# Altium PCB PCB-A6-2x3-V-CUT.PcbDoc
Units mm, origin at the board's own origin, x right, y up, seen from the top; angles counter-clockwise.
Board outline 146.6 x 176.2 mm, 2 copper layers (Top Layer, Bottom Layer); 10 components, 0 nets, 10 pads, 0 vias.
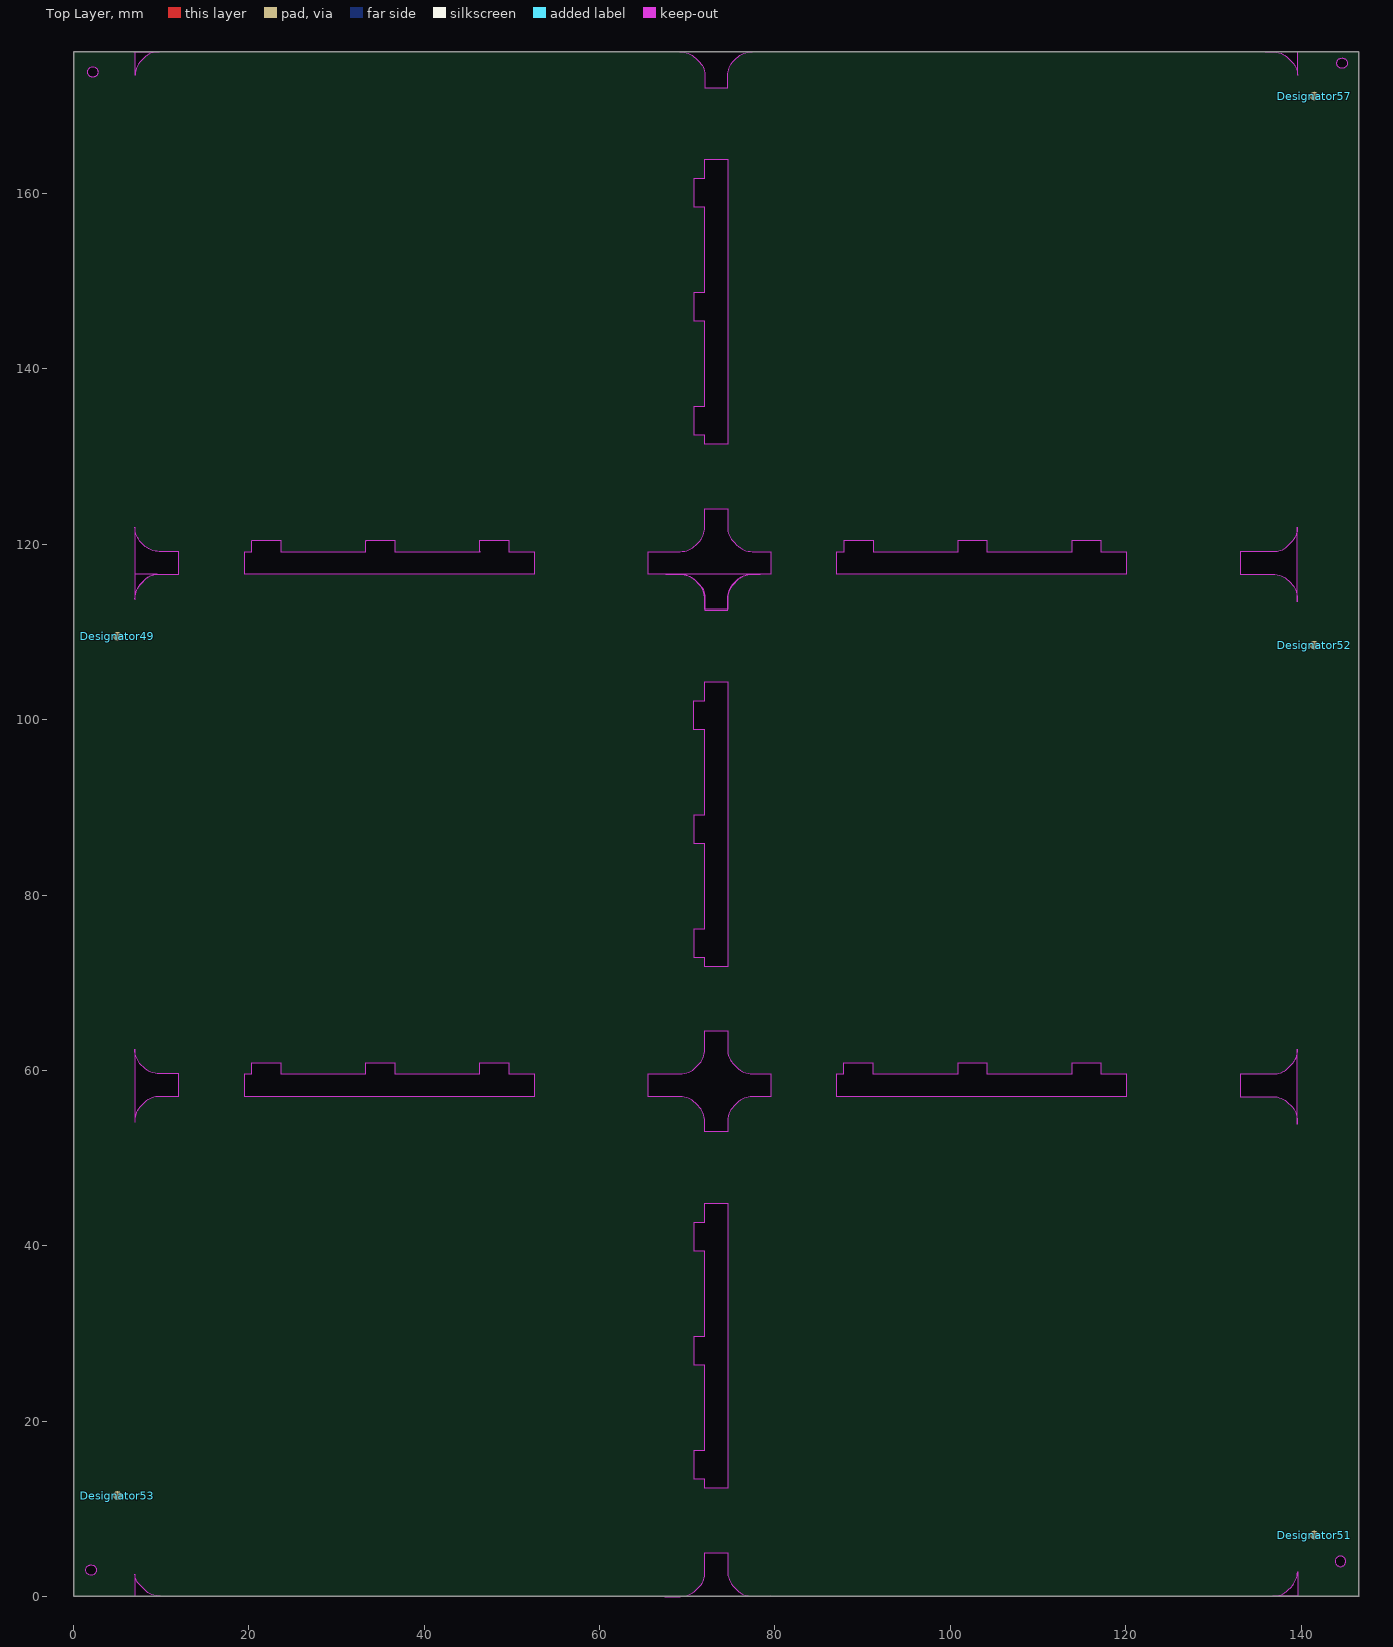
[diagram p0: Top Layer view]
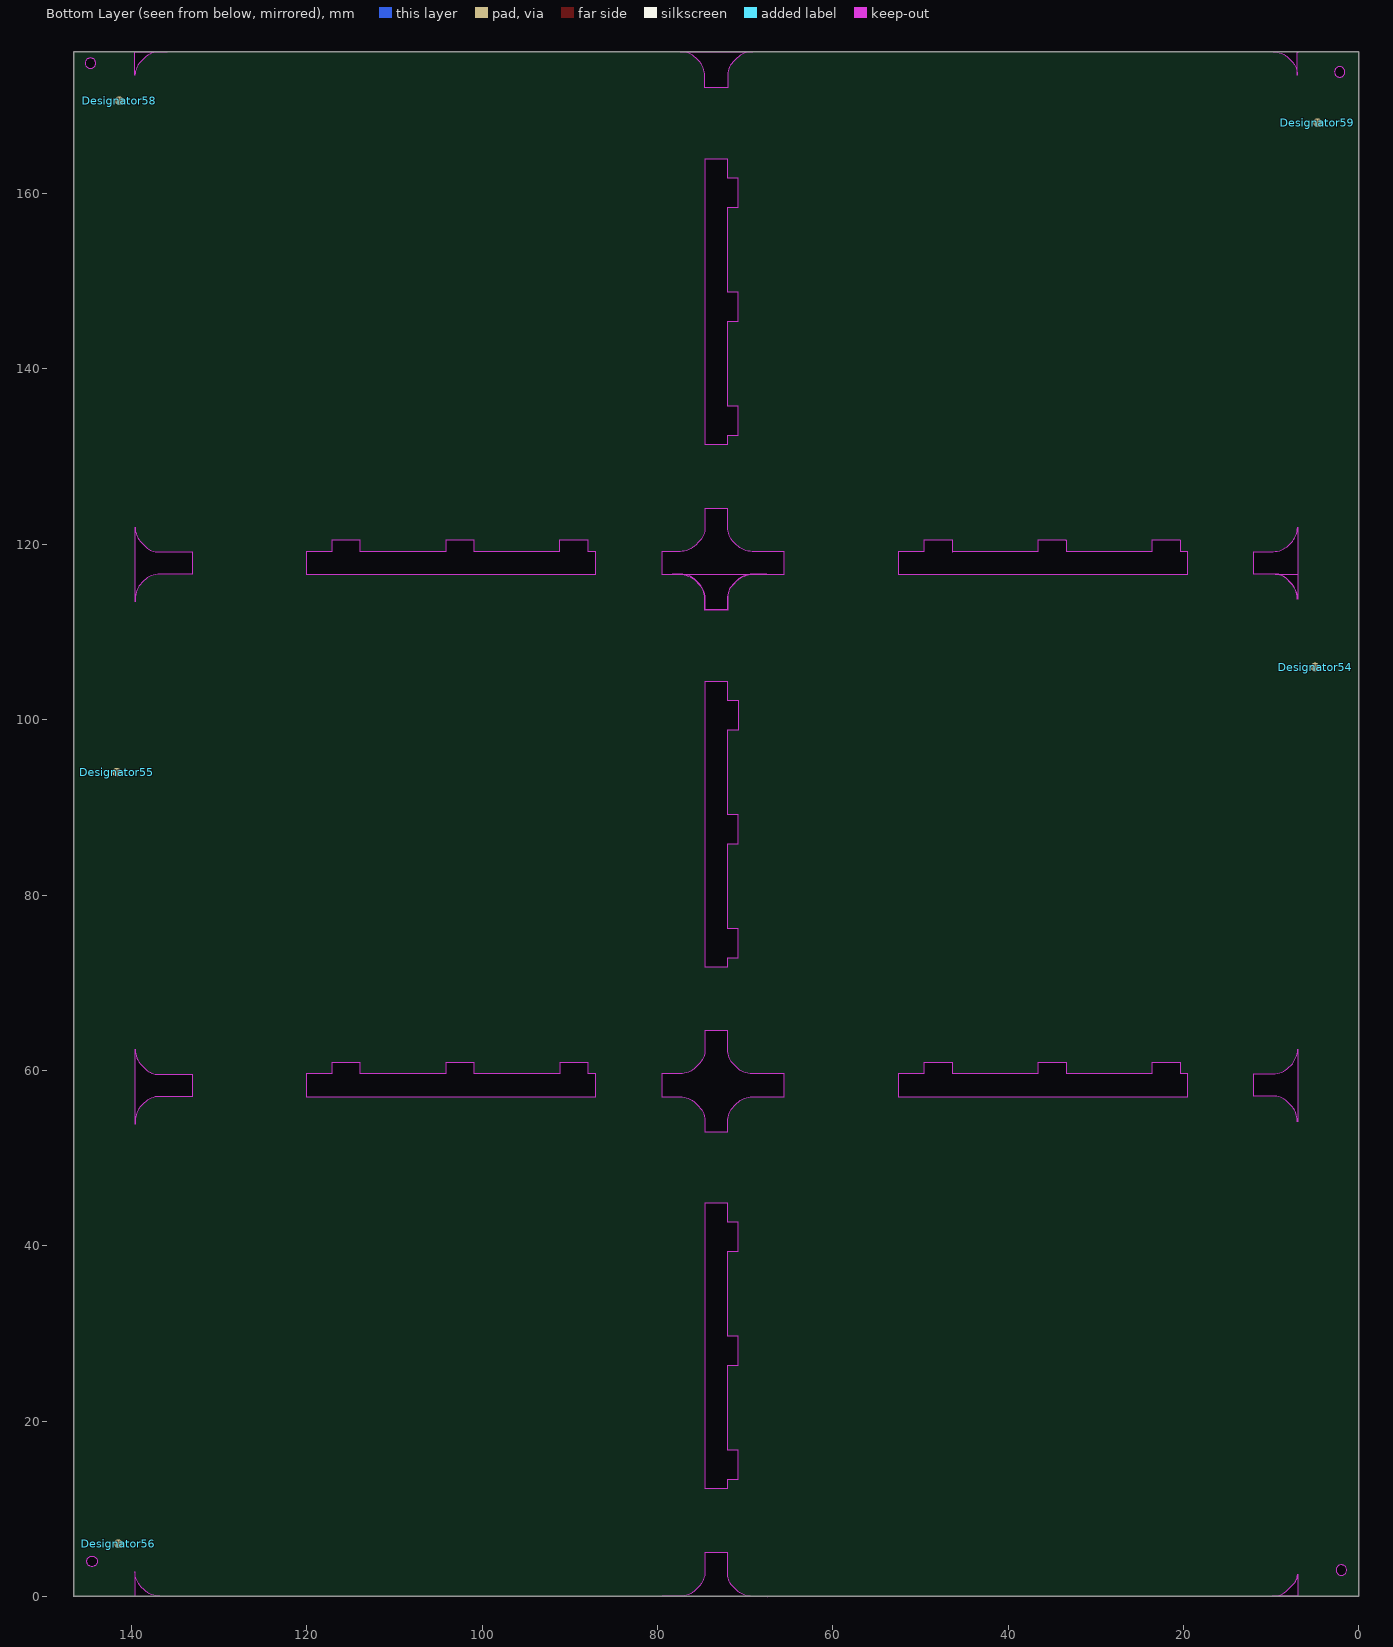
[diagram p1: Bottom Layer view, seen from below]

## Layer stack, top to bottom
Top Solder: solder mask 0.0102, Solder Resist, Dk 3.5
Top Layer: signal copper 0.0356
Dielectric 1: dielectric 0.32, FR-4, Dk 4.8
Bottom Layer: signal copper 0.0356
Bottom Solder: solder mask 0.0102, Solder Resist, Dk 3.5

## Board outline
0,176.2 146.6,176.2 146.6,0.012 cw(c146.57,0.042) 146.57,0 0,0
cut-out: 144.684,174.279 cw(c144.684,174.879) 144.084,174.879 cw(c144.684,174.879) 144.684,175.479 cw(c144.684,174.879) 145.284,174.879 cw(c144.684,174.879)
cut-out: 2.184,173.279 cw(c2.184,173.879) 1.584,173.879 cw(c2.184,173.879) 2.184,174.479 cw(c2.184,173.879) 2.784,173.879 cw(c2.184,173.879)
cut-out: 135.9,176.2 136.748,176.2 cw(c136.748,173.66) 138.544,175.456 138.964,175.036 cw(c137.427,173.5) 139.6,173.5 139.6,176.204
cut-out: 69.148,176.2 cw(c69.148,173.66) 70.944,175.456 71.4,175 cw(c69.943,173.543) 72.004,173.543 72.004,172.086 74.61,172.086 74.61,173.417 cw(c77.15,173.417) 75.354,175.213 75.597,175.456 cw(c77.393,173.66) 77.393,176.2
cut-out: 9.792,176.2 ccw(c9.792,173.66) 7.996,175.456 7.721,175.181 ccw(c9.402,173.5) 7.025,173.5 7.025,176.089 ccw(c6.94,176.089) 7,176.149 ccw(c6.876,176.025) 6.876,176.2
cut-out: 72.009,131.43 72.009,132.447 70.781,132.447 70.773,132.455 70.776,132.459 70.776,135.745 72.008,135.745 72.009,135.746 72.004,135.752 72.004,145.453 70.778,145.453 70.776,145.451 70.776,148.748 70.775,148.748 70.776,148.749 72.014,148.749 72.014,158.428 ccw(c71.978,158.428) 72.004,158.453 71.997,158.459 70.766,158.459 70.766,161.741 70.78,161.755 72.004,161.755 72.004,163.914 74.61,163.914 74.61,131.469 cw(c74.555,131.469) 74.594,131.43
cut-out: 7.017,113.732 7.017,113.809 cw(c9.557,113.809) 7.761,115.605 8.171,116.016 cw(c9.618,114.57) 9.618,116.615 12.006,116.615 12.006,119.176 9.785,119.176 cw(c9.785,121.716) 7.989,119.92 7.733,120.176 cw(c9.529,121.972) 6.989,121.972 6.989,113.742 ccw(c7.025,113.742) 6.999,113.717
cut-out: 19.493,119.176 20.341,119.176 20.341,120.435 20.348,120.442 23.648,120.442 23.648,119.177 23.649,119.176 33.344,119.176 33.345,119.177 33.345,120.417 cw(c33.385,120.417) 33.357,120.445 33.359,120.448 36.647,120.448 36.647,119.18 36.651,119.176 36.652,119.177 46.353,119.177 46.351,119.179 46.351,120.441 49.651,120.441 49.652,120.439 49.643,120.43 49.643,119.177 52.557,119.177 ccw(c52.62,119.114) 52.531,119.114 52.531,116.581 19.576,116.581 cw(c19.576,116.698) 19.493,116.615
cut-out: 87.025,119.175 87.873,119.175 87.873,120.435 87.88,120.442 91.18,120.442 91.18,119.176 91.181,119.175 100.876,119.175 100.877,119.177 100.877,120.417 cw(c100.917,120.417) 100.889,120.445 100.891,120.448 104.179,120.448 104.179,119.18 104.183,119.175 104.184,119.177 113.885,119.177 113.883,119.179 113.883,120.441 117.183,120.441 117.184,120.439 117.175,120.43 117.175,119.177 120.089,119.177 ccw(c120.153,119.113) 120.063,119.113 120.063,116.581 87.108,116.581 cw(c87.108,116.698) 87.025,116.615
cut-out: 133.052,119.142 133.056,119.139 133.056,116.595 136.778,116.595 cw(c136.778,114.055) 138.574,115.851 138.83,115.596 cw(c137.034,113.8) 139.574,113.8 139.574,113.457 ccw(c139.53,113.501) 139.592,113.501 139.592,121.964 cw(c137.052,121.964) 138.848,120.168 138.384,119.703 cw(c137.053,121.034) 137.053,119.152 133.057,119.152
cut-out: 72.002,124.082 74.586,124.082 74.586,122.014 ccw(c77.126,122.014) 75.33,120.218 75.628,119.92 ccw(c77.422,121.714) 77.422,119.177 79.538,119.177 79.538,116.581 77.441,116.581 ccw(c77.441,114.041) 75.645,115.837 75.279,115.471 ccw(c76.899,113.851) 74.608,113.851 74.608,112.569 72.002,112.569 72.002,113.726 ccw(c69.462,113.726) 71.258,115.522 70.944,115.837 ccw(c69.148,114.041) 69.148,116.581 65.521,116.581 65.521,119.177 69.188,119.177 ccw(c69.188,121.717) 70.985,119.921 71.258,120.194 ccw(c69.462,121.99) 72.002,121.99
cut-out: 136.751,0 ccw(c136.751,2.54) 138.547,0.744 138.864,1.061 ccw(c137.088,2.837) 139.6,2.837 139.6,0
cut-out: 7,113.771 cw(c9.54,113.771) 7.744,115.568 8.23,116.054 cw(c9.549,114.735) 9.549,116.6 7,116.6
cut-out: 7,0 9.894,0 cw(c9.894,2.54) 8.098,0.744 7.474,1.368 cw(c8.62,2.513) 7,2.513
cut-out: 67.546,116.599 69.157,116.599 cw(c69.157,114.059) 70.953,115.855 71.401,115.407 cw(c69.969,113.975) 71.995,113.975 71.995,112.489 74.601,112.489 74.601,113.815 cw(c77.141,113.815) 75.345,115.611 75.58,115.846 cw(c77.376,114.05) 77.376,116.59 78.318,116.59
cut-out: 67.441,-0.021 69.191,-0.021 ccw(c69.191,2.519) 70.988,0.723 71.449,1.184 ccw(c70.102,2.531) 72.006,2.531 72.006,4.995 74.591,4.995 74.591,2.842 ccw(c77.131,2.842) 75.335,1.046 75.626,0.754 ccw(c77.422,2.55) 77.422,0.01 79.481,0.01
cut-out: 72,71.834 72,72.851 70.772,72.851 70.764,72.859 70.767,72.863 70.767,76.149 71.999,76.149 72,76.15 71.995,76.156 71.995,85.857 70.769,85.857 70.767,85.855 70.767,89.151 70.766,89.152 70.767,89.153 72.005,89.153 72.005,98.832 ccw(c71.969,98.832) 71.995,98.857 71.988,98.863 70.757,98.863 70.757,102.145 70.771,102.159 71.995,102.159 71.995,104.318 74.601,104.318 74.601,71.873 cw(c74.546,71.873) 74.584,71.834
cut-out: 72.006,12.33 72.006,13.347 70.778,13.347 70.77,13.355 70.773,13.359 70.773,16.645 72.005,16.645 72.006,16.646 72.001,16.652 72.001,26.353 70.775,26.353 70.773,26.351 70.773,29.647 70.772,29.648 70.773,29.649 72.011,29.649 72.011,39.328 ccw(c71.975,39.328) 72.001,39.353 71.994,39.359 70.763,39.359 70.763,42.641 70.777,42.655 72.001,42.655 72.001,44.814 74.607,44.814 74.607,12.369 cw(c74.552,12.369) 74.591,12.33
cut-out: 72,64.499 74.584,64.499 74.584,62.431 ccw(c77.124,62.431) 75.328,60.635 75.627,60.337 ccw(c77.421,62.131) 77.421,59.594 79.536,59.594 79.536,56.998 77.439,56.998 ccw(c77.439,54.458) 75.643,56.254 75.278,55.888 ccw(c76.898,54.268) 74.607,54.268 74.607,52.985 72.001,52.985 72.001,54.143 ccw(c69.461,54.143) 71.257,55.939 70.942,56.254 ccw(c69.146,54.458) 69.146,56.998 65.519,56.998 65.519,59.594 69.187,59.594 ccw(c69.187,62.134) 70.983,60.338 71.256,60.611 ccw(c69.46,62.407) 72,62.407
cut-out: 133.051,59.559 133.055,59.556 133.055,57.012 136.777,57.012 cw(c136.777,54.472) 138.573,56.268 138.828,56.013 cw(c137.032,54.217) 139.572,54.217 139.572,53.874 ccw(c139.528,53.918) 139.591,53.918 139.591,62.381 cw(c137.051,62.381) 138.847,60.585 138.382,60.12 cw(c137.051,61.451) 137.051,59.569 133.056,59.569
cut-out: 87.024,59.592 87.872,59.592 87.872,60.852 87.878,60.859 91.179,60.859 91.179,59.593 91.18,59.592 100.875,59.592 100.876,59.594 100.876,60.834 cw(c100.915,60.834) 100.888,60.862 100.89,60.864 104.177,60.864 104.177,59.597 104.182,59.592 104.183,59.594 113.884,59.594 113.882,59.596 113.882,60.858 117.181,60.858 117.183,60.856 117.174,60.847 117.174,59.594 120.088,59.594 ccw(c120.151,59.53) 120.062,59.53 120.062,56.997 87.107,56.997 cw(c87.107,57.115) 87.024,57.032
cut-out: 19.492,59.592 20.34,59.592 20.34,60.852 20.346,60.859 23.647,60.859 23.647,59.593 23.648,59.592 33.343,59.592 33.344,59.594 33.344,60.834 cw(c33.383,60.834) 33.355,60.862 33.358,60.865 36.645,60.865 36.645,59.597 36.65,59.592 36.651,59.594 46.352,59.594 46.349,59.596 46.349,60.858 49.649,60.858 49.651,60.856 49.642,60.847 49.642,59.594 52.556,59.594 ccw(c52.619,59.53) 52.53,59.53 52.53,56.998 19.575,56.998 cw(c19.575,57.115) 19.492,57.032
cut-out: 7.015,54.149 7.015,54.226 cw(c9.555,54.226) 7.759,56.022 8.17,56.433 cw(c9.616,54.986) 9.616,57.032 12.005,57.032 12.005,59.592 9.784,59.592 cw(c9.784,62.132) 7.988,60.336 7.731,60.593 cw(c9.528,62.389) 6.988,62.389 6.988,54.159 ccw(c7.023,54.159) 6.998,54.134
cut-out: 2,2.4 cw(c2,3) 1.4,3 cw(c2,3) 2,3.6 cw(c2,3) 2.6,3 cw(c2,3)
cut-out: 143.9,4 ccw(c144.5,4) 144.5,3.4 ccw(c144.5,4) 145.1,4 ccw(c144.5,4) 144.5,4.6 ccw(c144.5,4)

## Design rules (kind name [scope] priority, off if disabled: settings)
Clearance [All] p1: gap=0.254 ignorepadtopadclearanceinfootprint=FALSE except(0: Arc-Hole Track-Hole SMDPad-Hole THPad-Hole Via-Hole Fill-Hole Poly-Hole Region-Hole Text-Hole)
PolygonConnect [All] p1: connectstyle=Relief reliefconductorwidth=0.254 reliefentries=4 polygonreliefangle="90 Angle" airgapwidth=0.254
RoutingVias [All] p1: holewidth=0.711 width=1.27 viastyle="Through Hole" minholewidth=0.711 minwidth=1.27 maxholewidth=0.711 maxwidth=1.27
SolderMaskExpansion [All] p1: expansion=0.102 istentingtop=FALSE
Width [All] p1: maxlimit=0.254 minlimit=0.254 preferedwidth=0.254
30 further rules are at their usual default settings.

## Components (designator, comment, footprint, x,y, rotation, side; value= is the part's Value field where it differs from the comment)
Designator49 "Comment" FID10-20 5,109.5 r0 top
Designator51 "Comment" FID10-20 141.529,6.997 r0 top
Designator52 "Comment" FID10-20 141.5,108.5 r0 top
Designator53 "Comment" FID10-20 5,11.5 r0 top
Designator54 "Comment" FID10-20 5,106 r180 bottom
Designator55 "Comment" FID10-20 141.695,94 r180 bottom
Designator56 "Comment" FID10-20 141.5,6 r180 bottom
Designator57 "Comment" FID10-20 141.5,171.126 r0 top
Designator58 "Comment" FID10-20 141.4,170.6 r180 bottom
Designator59 "Comment" FID10-20 4.722,168.1 r180 bottom

## Footprints (in the part's own frame and the unit in brackets; to place one, negate y for a bottom-side part, rotate by r counter-clockwise, add the part's x,y. Pads: shape width x height; smd on the part's side, far side on the other; paste and mask are expansions set on the pad)
FID10-20 [mm] "Fiducial mark.  There is nothing to buy or mount."
  round 1 smd mask+0.5: 1(0,0)
  Top Layer pour cut-out: 0,-1 -0.383,-0.924 -0.707,-0.707 -0.924,-0.383 -1,0 -1,0 -0.924,0.383 -0.707,0.707 -0.383,0.924 0,1 0,1 0.383,0.924 0.707,0.707 0.924,0.383 1,0 1,0 0.924,-0.383 0.707,-0.707 0.383,-0.924 0,-1

## Nets (pads, with @x,y where several pads share a name; then routed paths per layer and width w, separated by ;. In a path a pad name is that pad's centre, name@x,y a point inside that pad or via, vN(x,y) a via of type N, cw(c..) or ccw(c..) an arc to the next point about the centre after c; other vN are vias at no path point)
pads on no net: Designator49.1 Designator51.1 Designator52.1 Designator53.1 Designator54.1 Designator55.1 Designator56.1 Designator57.1 Designator58.1 Designator59.1

## Silkscreen, mask and mechanical layers (free items; w line width, h text height)
Board Outline:
  circle w0.2: c144.684,174.879 r0.6
  circle w0.2: c2.184,173.879 r0.6
  circle w0.2: c2,3 r0.6
  circle w0.2: c144.5,4 r0.6
  pour cut-out: 136.788,116.6 cw(c136.788,114.06) 138.584,115.856 138.856,115.584 cw(c137.06,113.788) 139.6,113.788 139.6,116.6
  lines w0.2: -4.7,57.032 -1.064,57.032 ; -4.7,59.592 -1.064,59.592 ; -1.611,56.528 -1.064,57.032 ; -1.611,57.526 -1.064,57.032 ; -1.611,59.088 -1.064,59.592 ; -1.611,60.086 -1.064,59.592 ; 6.521,178.128 7.025,177.581 ; 7.025,181.217 7.025,177.581 ; 7.518,178.128 7.025,177.581 ; 11.997,119.109 12,119.109 12,116.643 ; 12.002,59.592 12.005,59.592 12.005,57.032 ; 19.487,116.549 19.487,119.109 19.498,119.109 ; 19.492,57.032 19.492,59.592 19.503,59.592 ; 52.525,116.514 52.525,119.11 52.551,119.11 ; 52.53,56.998 52.53,59.594 52.556,59.594 ; 65.515,116.514 65.515,119.11 67.223,119.11 ; 65.519,56.998 65.519,59.594 67.228,59.594 ; 71.515,178.819 72.019,178.271 ; 71.995,104.318 74.601,104.318 ; 71.995,112.489 74.601,112.489 ; 72.001,44.814 74.607,44.814 ; 72.001,52.985 74.607,52.985 ; 72,64.499 74.584,64.499 ; 72,71.834 74.584,71.834 ; 72.004,163.914 74.61,163.914 ; 72.004,172.086 74.61,172.086 ; 72.006,4.995 74.591,4.995 ; 72.006,12.33 74.591,12.33 ; 72.009,124.095 74.594,124.095 ; 72.009,131.43 74.594,131.43 ; 72.019,181.908 72.019,178.271 ; 72.513,178.819 72.019,178.271 ; 74.121,178.819 74.625,178.271 ; 74.625,181.908 74.625,178.271 ; 75.119,178.819 74.625,178.271 ; 79.492,119.11 79.532,119.11 ; 79.496,59.594 79.536,59.594 ; 79.532,116.514 79.532,119.075 ; 79.536,56.998 79.536,59.558 ; 87.019,116.514 87.019,119.075 ; 87.023,56.998 87.023,59.558 ; 120.054,119.076 120.073,119.076 120.073,116.606 ; 120.058,59.559 120.077,59.559 120.077,57.089 ; 133.046,116.48 133.046,119.076 ; 133.051,56.963 133.051,59.559 ; 139.121,178.805 139.625,178.258 ; 139.625,181.894 139.625,178.258 ; 140.118,178.805 139.625,178.258 ; 0,0 7,0 7,176.149 0,176.149 0,0 ; 139.6,0 139.6,176.184 146.6,176.184 146.6,0 139.6,0
  text "V-CUT" at 72.835,182.661 h3 r90
  text "V-CUT" at 75.441,182.661 h3 r90
  text "V-CUT" at 140.44,182.648 h3 r90
  text "V-CUT" at 7.84,181.971 h3 r90
  text "CNC" at 74.108,90.924 h2.54 r90
  text "V-CUT" at -12.374,58.777 h3
  text "CNC" at 8.17,57.685 h2.54
  text "CNC" at 105.458,57.685 h2.54
  text "CNC" at 136.186,57.685 h2.54
  text "CNC" at 27.347,57.558 h2.54
  text "CNC" at 74.337,57.05 h2.54 r90
  text "V-CUT" at -12.374,56.217 h3
  text "CNC" at 74.083,32.539 h2.54 r90

## Panel: embedded boards
"PCB_A6O.pcbdoc" at 7,0, 3 rows x 2 columns, spacing 59.6 x 67.6, rotation 0